# Altium PCB 2016_CARTE_MATRICE_LED.PcbDoc
Units mm, origin at the board's own origin, x right, y up, seen from the top; angles counter-clockwise.
Board outline 32 x 32 mm, 4 copper layers (Top Layer, Internal Plane 1, Internal Plane 2, Bottom Layer), stack 0.462 mm thick; 7 components, 25 nets, 54 pads, 0 vias.
Unrouted connection lines stored in the file: 29.
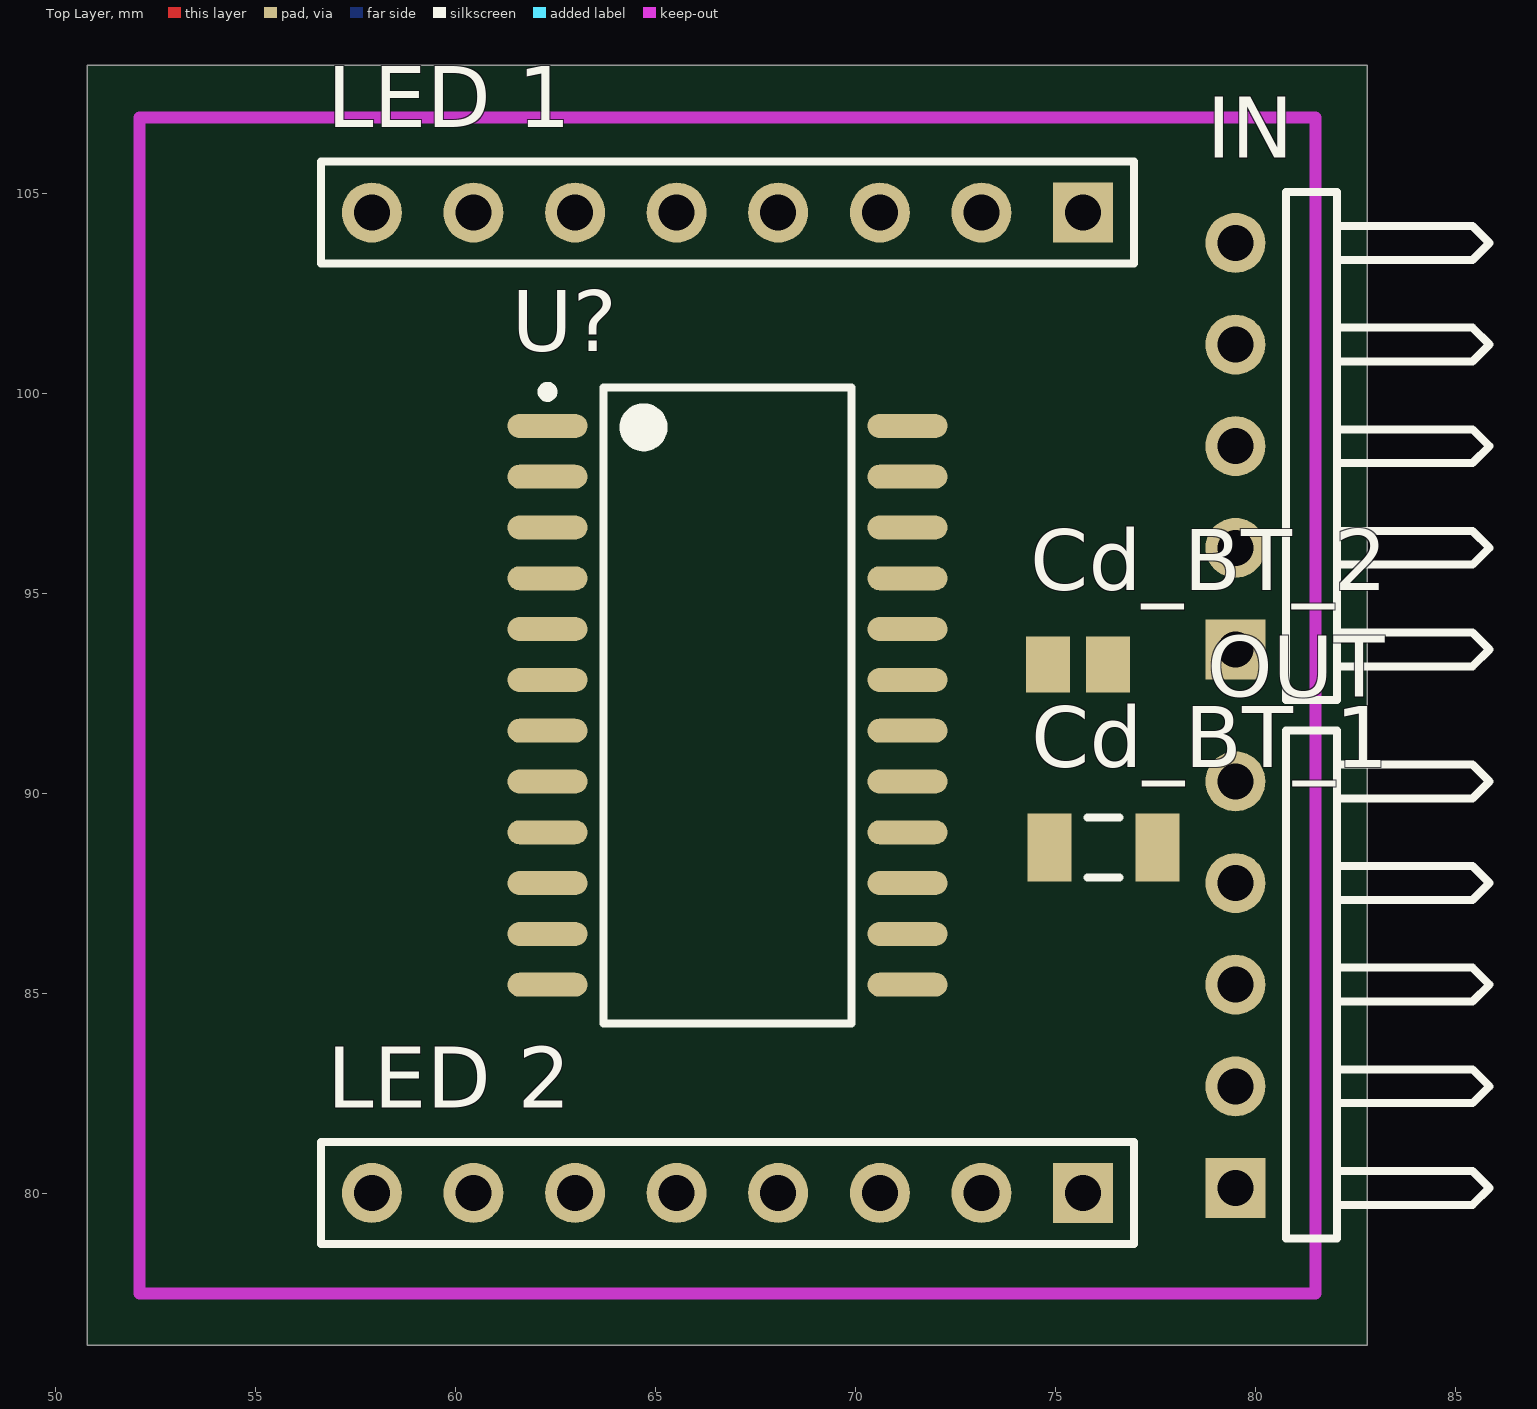
[diagram p0: Top Layer view]
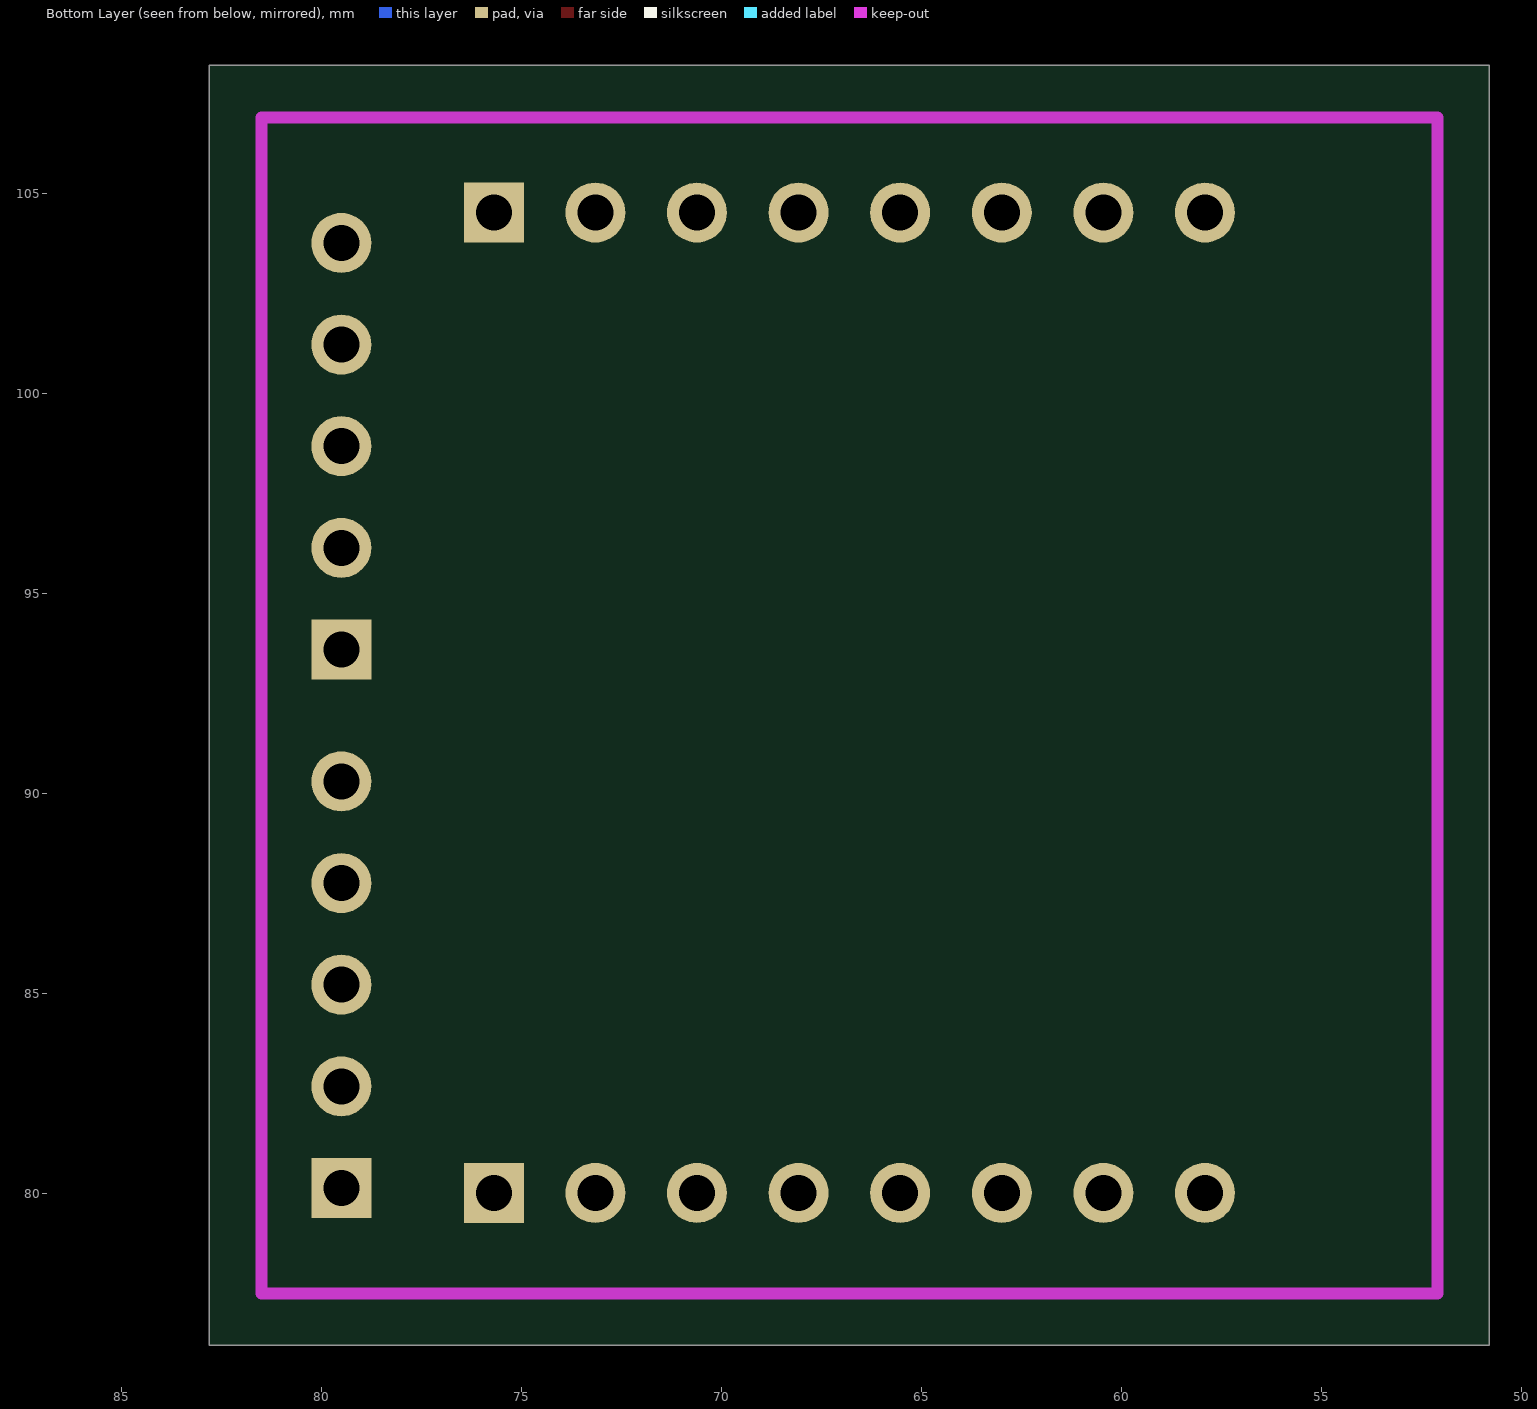
[diagram p1: Bottom Layer view, seen from below]
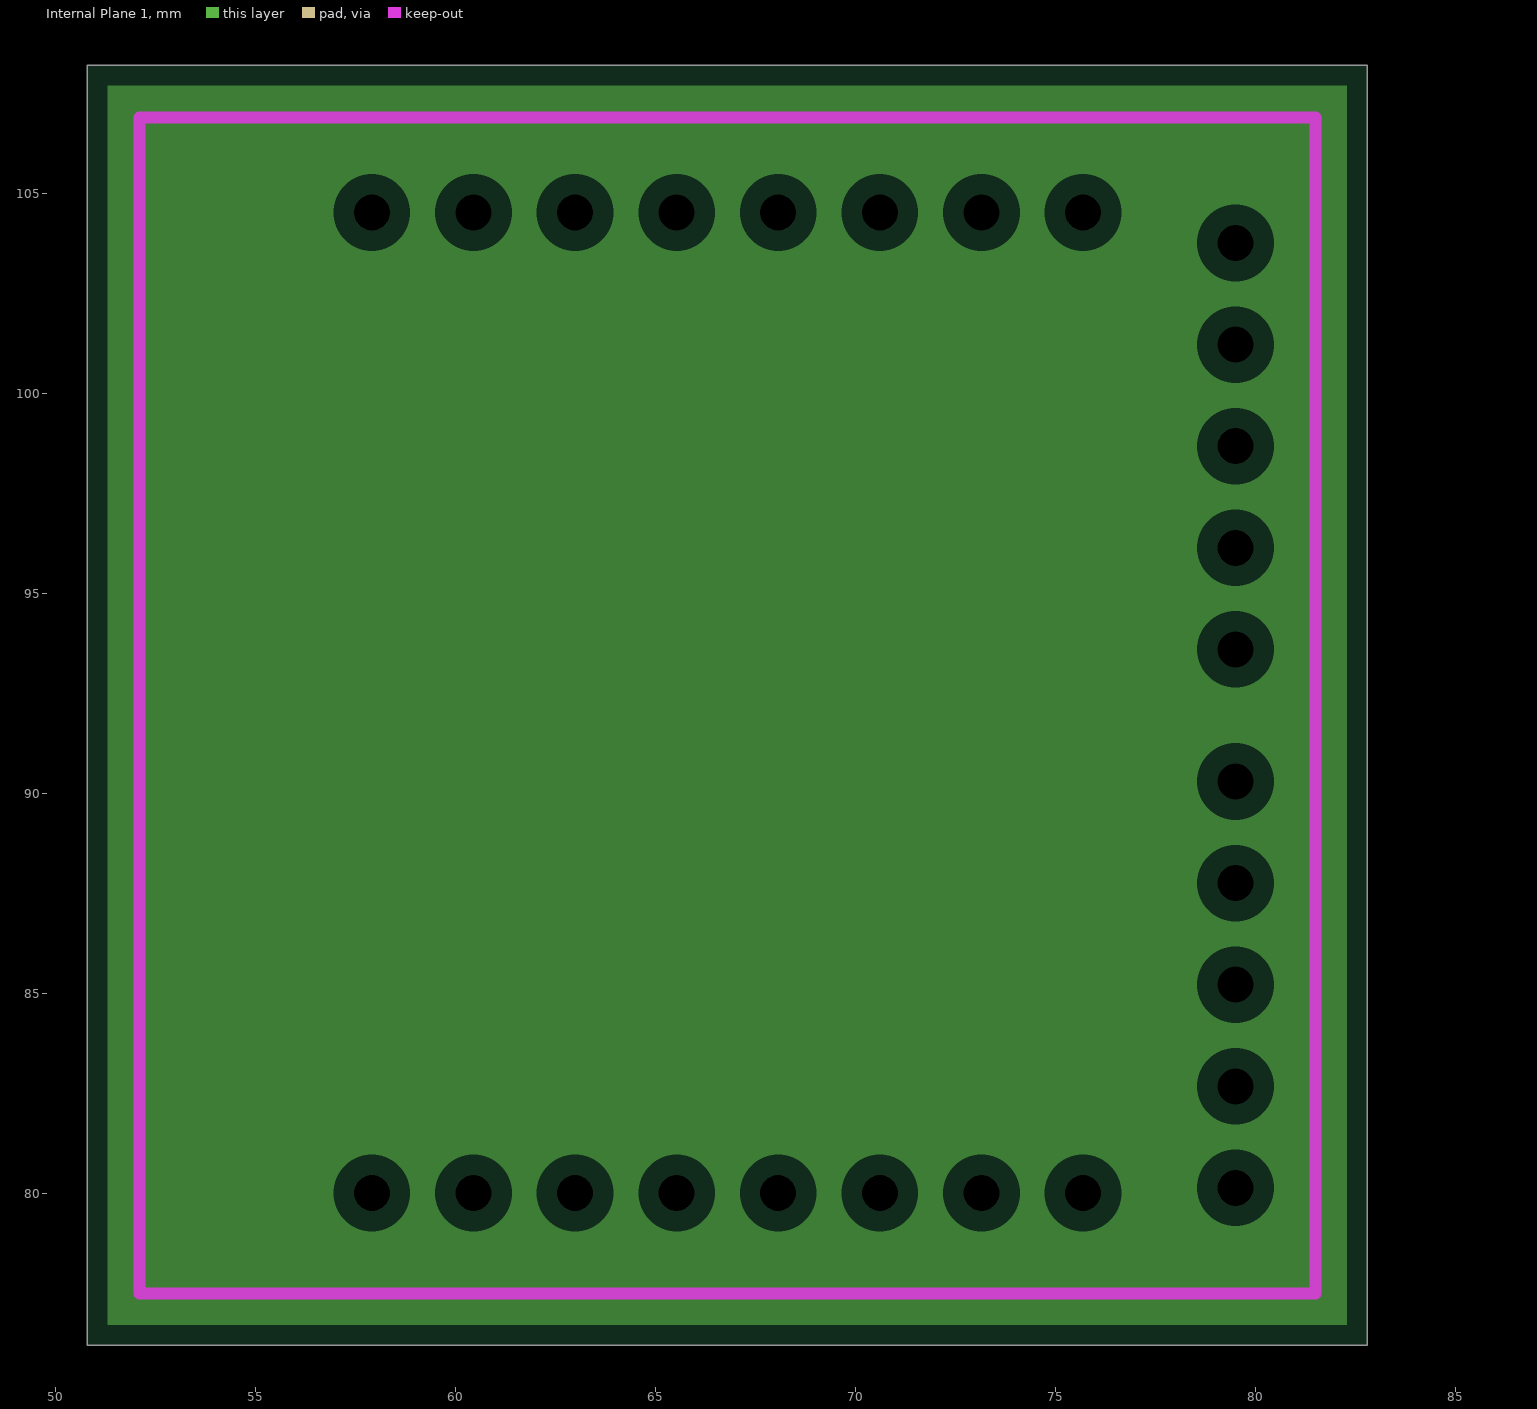
[diagram p2: Internal Plane 1, clearances drawn from the general rule]
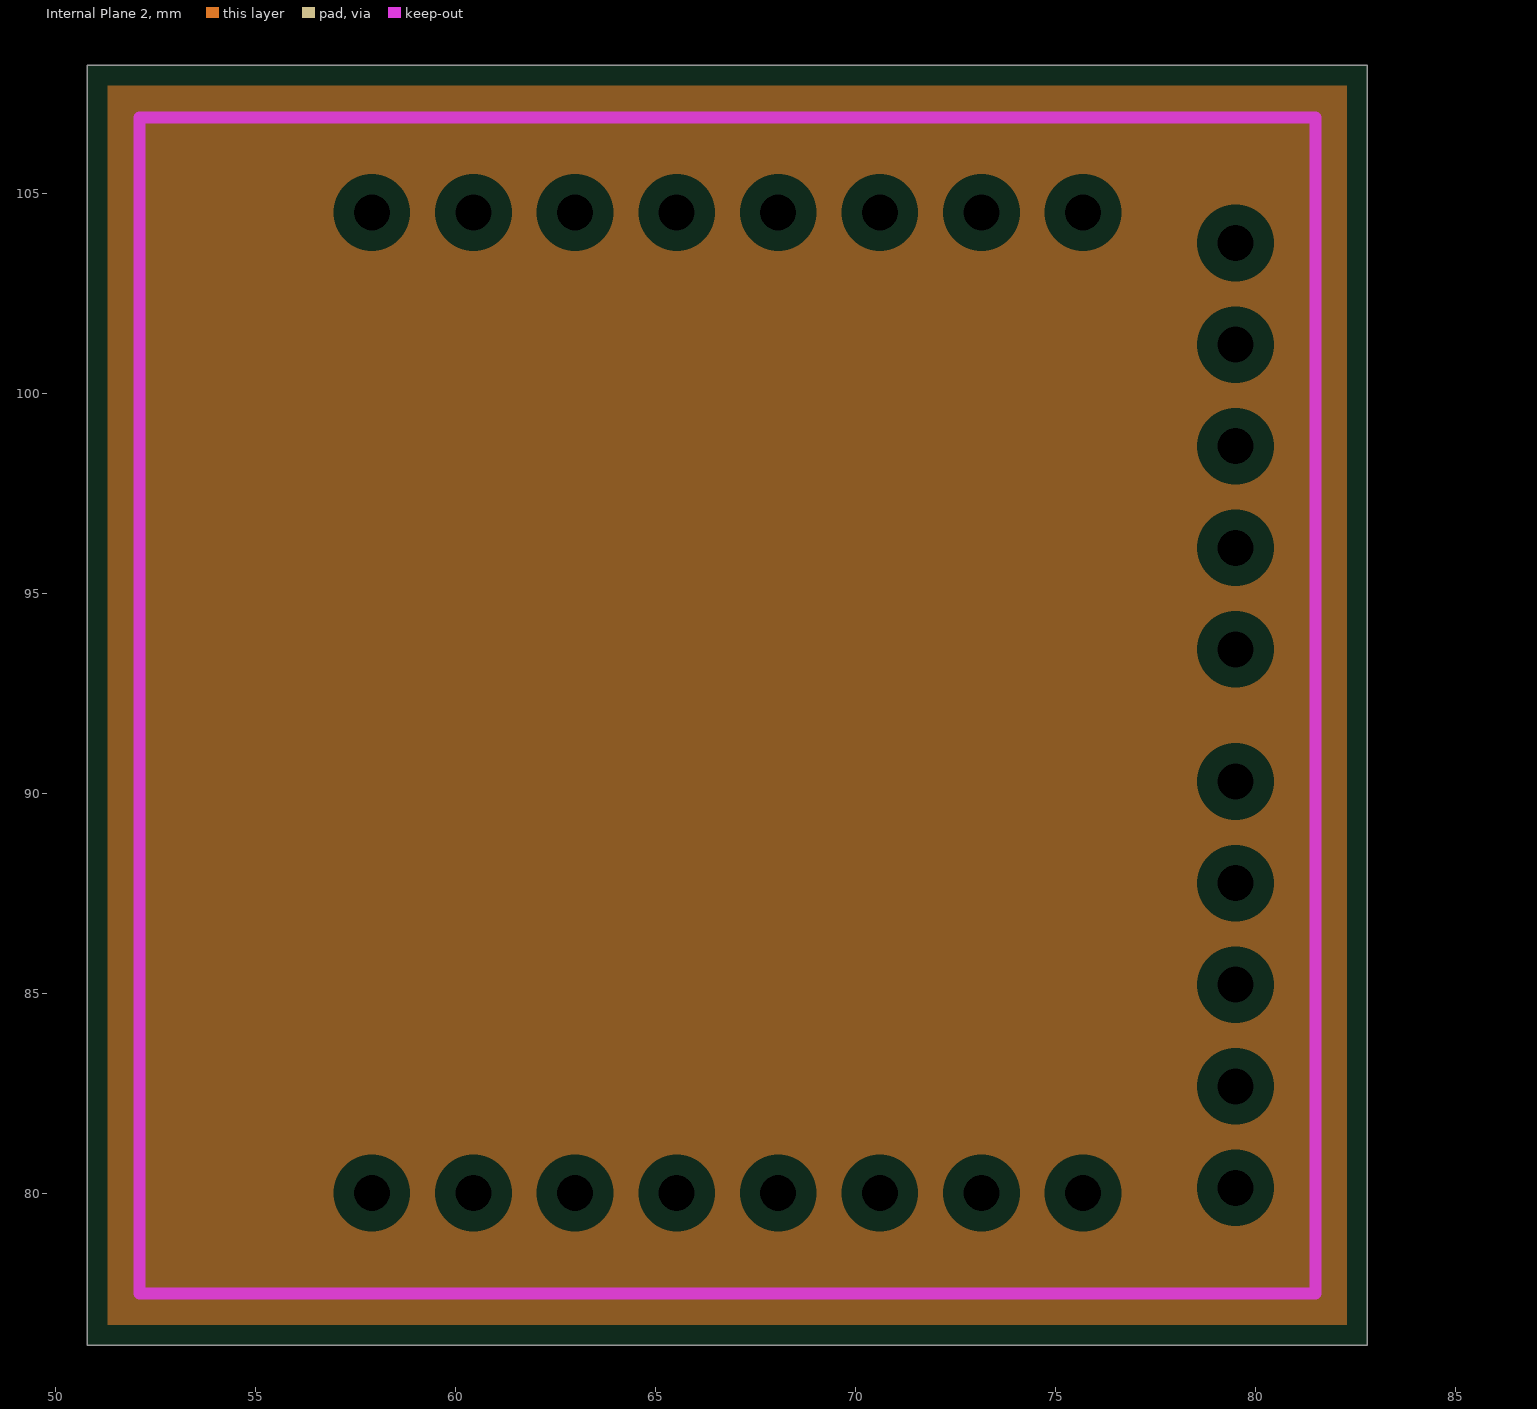
[diagram p3: Internal Plane 2, clearances drawn from the general rule]

## Layer stack, top to bottom
Top Solder: solder mask 0.0102, Solder Resist, Dk 3.5
Top Layer: signal copper 0.0356
Internal Plane 1: plane copper 0.0356
Internal Plane 2: plane copper 0.0356
Dielectric 1: dielectric 0.32, FR-4, Dk 4.8
Bottom Layer: signal copper 0.0356
Bottom Solder: solder mask 0.0102, Solder Resist, Dk 3.5

## Board outline
50.8,76.2 82.8,76.2 82.8,108.2 50.8,108.2

## Design rules (kind name [scope] priority, off if disabled: settings)
Clearance [All] p1: gap=0.2
PlaneClearance [All] p1: clearance=0.508
PlaneConnect [All] p1: planeconnectstyle=Relief reliefexpansion=0.508 reliefentries=4 reliefconductorwidth=0.254 reliefairgap=0.254
PolygonConnect [All] p1: connectstyle=Relief reliefconductorwidth=0.254 reliefentries=4 polygonreliefangle="90 Angle" airgapwidth=0.254
RoomDefinition MatriceLED [InComponentClass('MatriceLED')] p1: confinementstyle=ConfineIn formatcopy=TRUE lockcomponents=FALSE outline 83.947,77.724 153.543,77.724 153.543,101.092 83.947,101.092
RoutingVias [All] p1: holewidth=0.6 width=1 viastyle="Through Hole" minholewidth=0.711 minwidth=1.27 maxholewidth=0.711 maxwidth=1.27
SolderMaskExpansion [All] p1: expansion=0.102
Width [All] p1: maxlimit=0.2 minlimit=0.2 preferedwidth=0.2
27 further rules are at their usual default settings.

## Components (designator, comment, footprint, x,y, rotation, side; value= is the part's Value field where it differs from the comment)
Cd_BT_1 "10uF" C1206 76.2,88.646 r180 top
Cd_BT_2 "100nF" C0805 75.565,93.218 r180 top
IN "Header 5H" HDR1X5H 79.502,93.599 r90 top
"LED 1" "Header 8" HDR1X8 75.692,104.521 r180 top
"LED 2" "Header 8" HDR1X8 75.692,80.01 r180 top
OUT "Header 5H" HDR1X5H 79.502,80.137 r90 top
U? "MAX7219CWG" WSO24_L 66.802,92.202 r0 top

## Footprints (in the part's own frame and the unit in brackets; to place one, negate y for a bottom-side part, rotate by r counter-clockwise, add the part's x,y. Pads: shape width x height; smd on the part's side, far side on the other; paste and mask are expansions set on the pad)
C0805 [mm] "Chip Capacitor, Body 2.0x1.3mm, IPC High Density"
  rect 1.1x1.4 smd: 1(-0.75,0) 2(0.75,0)
  body extent -1.1,-0.72 1.1,0.72, height 1.4
C1206 [mm] "Chip Capacitor, Body 3.2x1.6mm, IPC High Density"
  rect 1.1x1.7 smd: 1(-1.35,0) 2(1.35,0)
  silkscreen extent -0.4,-0.75 0.4,0.75, body extent -1.7,-0.9 1.7,0.9, height 1.3
HDR1X5H [mm] "Connector; Header; 5 Position; Right Angle"
  rect 1.5x1.5 hole 0.9: 1(0,0)
  round 1.5 hole 0.9: 2(2.54,0) 3(5.08,0) 4(7.62,0) 5(10.16,0)
  silkscreen extent -1.27,-6.35 11.43,-1.27
HDR1X8 [mm] "Connector; Header; 8 Position"
  rect 1.5x1.5 hole 0.9: 1(0,0)
  round 1.5 hole 0.9: 2(2.54,0) 3(5.08,0) 4(7.62,0) 5(10.16,0) 6(12.7,0) 7(15.24,0) 8(17.78,0)
  silkscreen extent -1.27,-1.27 19.05,1.27
WSO24_L [mm] "SOIC, 24-Leads, Body 15.4x7.5mm, Pitch 1.27mm, IPC High Density"
  oval 2x0.6 smd: 1(-4.5,6.985) 2(-4.5,5.715) 3(-4.5,4.445) 4(-4.5,3.175) 5(-4.5,1.905) 6(-4.5,0.635) 7(-4.5,-0.635) 8(-4.5,-1.905) 9(-4.5,-3.175) 10(-4.5,-4.445) 11(-4.5,-5.715) 12(-4.5,-6.985) 13(4.5,-6.985) 14(4.5,-5.715) 15(4.5,-4.445) 16(4.5,-3.175) 17(4.5,-1.905) 18(4.5,-0.635) 19(4.5,0.635) 20(4.5,1.905) 21(4.5,3.175) 22(4.5,4.445) 23(4.5,5.715) 24(4.5,6.985)
  silkscreen extent -4.62,-7.95 3.1,7.96, body extent -3.8,-7.8 3.8,7.8, height 2.65

## Part data
Cd_BT_1 Cd_BT_2: library part Condensateur, "Capacitor"
IN OUT: "Header, 5-Pin, Right Angle"
"LED 1" "LED 2": "Header, 8-Pin"
U?: "Serially Interfaced, 8-Digit LED Display Driver"

## Nets (pads, with @x,y where several pads share a name; then routed paths per layer and width w, separated by ;. In a path a pad name is that pad's centre, name@x,y a point inside that pad or via, vN(x,y) a via of type N, cw(c..) or ccw(c..) an arc to the next point about the centre after c; other vN are vias at no path point)
CLK: IN.5 OUT.5 U?.13
CS: IN.4 OUT.4 U?.12
DIN: IN.3 U?.1
DOUT: OUT.3 U?.24
GND: IN.2 OUT.2 U?.4 U?.9
"MAT 1": "LED 1.1" U?.17
"MAT 2": "LED 1.2" U?.15
"MAT 3": "LED 1.3" U?.11
"MAT 4": "LED 1.4" U?.22
"MAT 5": "LED 1.5" U?.7
"MAT 6": "LED 1.6" U?.21
"MAT 7": "LED 1.7" U?.20
"MAT 8": "LED 1.8" U?.2
"MAT 11": "LED 2.1" U?.3
"MAT 22": "LED 2.2" U?.5
"MAT 33": "LED 2.3" U?.14
"MAT 44": "LED 2.4" U?.16
"MAT 55": "LED 2.5" U?.8
"MAT 66": "LED 2.6" U?.23
"MAT 77": "LED 2.7" U?.10
"MAT 88": "LED 2.8" U?.6
NetCd_BT_1_2: Cd_BT_1.2 Cd_BT_2.1
NetCd_BT_2_2: Cd_BT_2.2 U?.19
NetRs1_1: U?.18
VCC: Cd_BT_1.1 IN.1 OUT.1

## Keep-outs
Keep-Out Layer:
  lines w0.3: 52.1,77.5 81.5,77.5 81.5,106.9 52.1,106.9 52.1,77.5

## Silkscreen, mask and mechanical layers (free items; w line width, h text height)
Drill Drawing:
  text ".LEGEND" at 87.88,81.28 h1.52
  text "Drill Drawing." at 87.88,78.74 h1.52

## Dimensions
52.1,77.5 to 81.5,77.5 on Mechanical 1
52.1,77.5 to 52.1,106.9 on Mechanical 1